# Altium PCB GRHV_Double_25v_KC.PcbDoc
Units mil, origin at the board's own origin, x right, y up, seen from the top; angles counter-clockwise.
Board outline 3000 x 4625 mil, 2 copper layers (Top Layer, Bottom Layer); 83 components, 41 nets, 200 pads, 4 vias.
Unrouted connection lines stored in the file: 26.
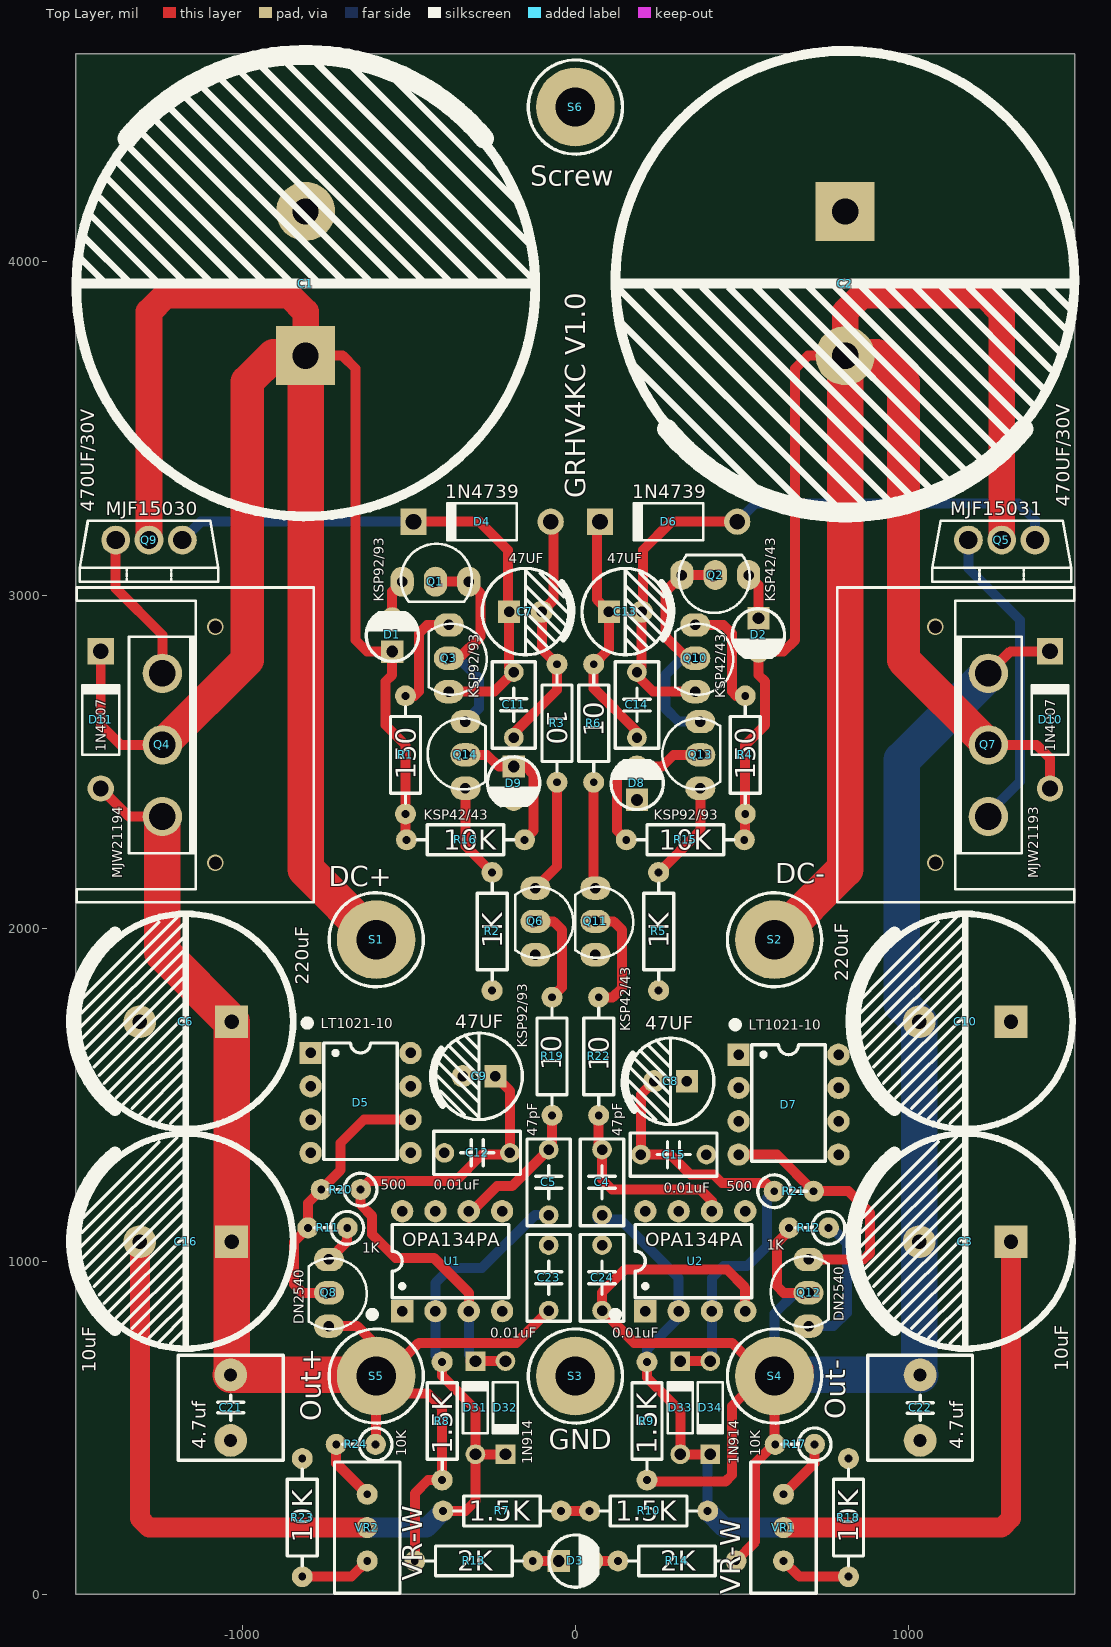
[diagram p0: Top Layer view]
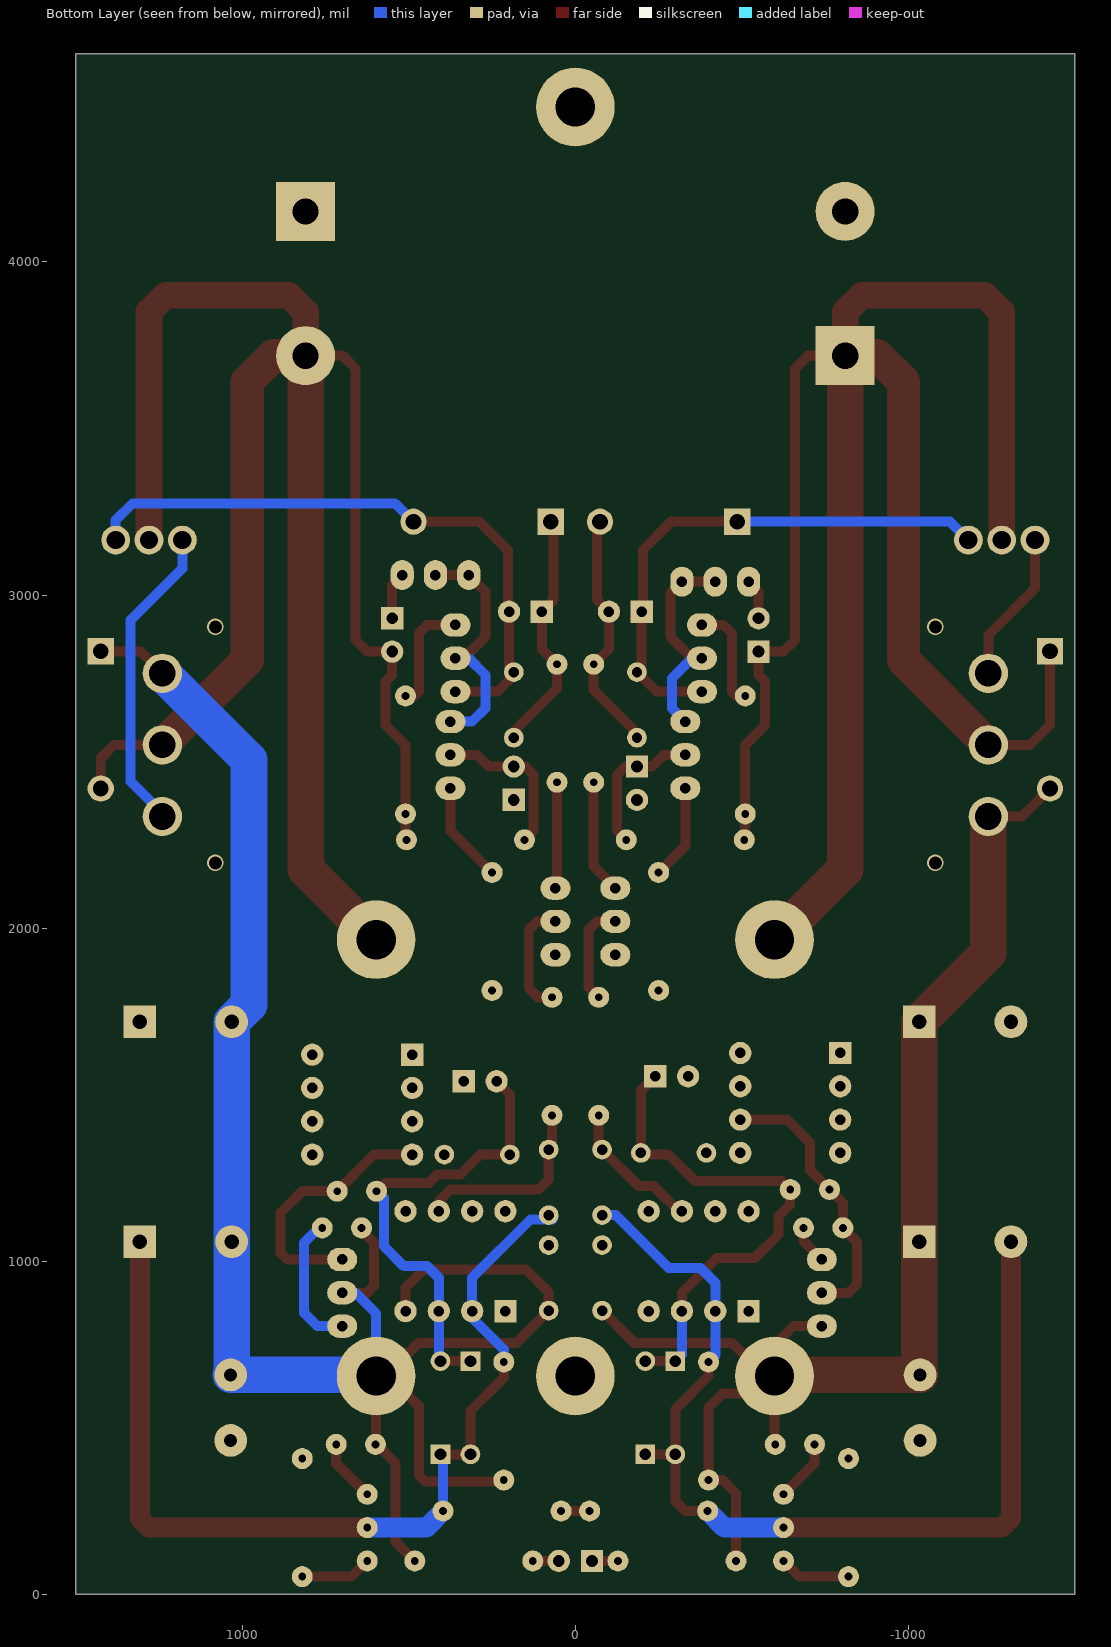
[diagram p1: Bottom Layer view, seen from below]

## Layer stack, top to bottom
Top Solder: solder mask 0.4, Solder Resist, Dk 3.5
Top Layer: signal copper 1.4
Dielectric 1: dielectric 12.6, FR-4, Dk 4.8
Bottom Layer: signal copper 1.4
Bottom Solder: solder mask 0.4, Solder Resist, Dk 3.5

## Board outline
-1500,0 1500,0 1500,4625 -1500,4625

## Design rules (kind name [scope] priority, off if disabled: settings)
Clearance [All] p1: gap=10 ignorepadtopadclearanceinfootprint=FALSE except(0: Arc-Hole Track-Hole SMDPad-Hole THPad-Hole Via-Hole Fill-Hole Poly-Hole Region-Hole Text-Hole)
PlaneClearance [All] p1: clearance=30
PlaneConnect [All] p1: planeconnectstyle=Relief reliefexpansion=20 reliefentries=4 reliefconductorwidth=20 reliefairgap=30
PolygonConnect [All] p1: thpad.connectstyle=Relief thpad.reliefconductorwidth=20 thpad.reliefentries=4 thpad.polygonreliefangle="45 Angle" thpad.airgapwidth=20 smdpad.connectstyle=Relief smdpad.reliefconductorwidth=20 smdpad.reliefentries=4 smdpad.polygonreliefangle="90 Angle" smdpad.airgapwidth=20 via.connectstyle=Relief via.reliefconductorwidth=20 via.reliefentries=4 via.polygonreliefangle="45 Angle" via.airgapwidth=20
RoomDefinition GRHV_Double_25v_KC [InComponentClass('GRHV_Double_25v_KC')] p1: confinementstyle=ConfineIn formatcopy=TRUE lockcomponents=FALSE outline 3180,-460 23330,-460 23330,590 3180,590
RoutingVias [All] p1: holewidth=28 width=50 viastyle="Through Hole" minholewidth=28 minwidth=50 maxholewidth=28 maxwidth=50
SolderMaskExpansion [All] p1: expansion=4
Width [All] p1: maxlimit=220 minlimit=10 preferedwidth=60
28 further rules are at their usual default settings.

## Components (designator, comment, footprint, x,y, rotation, side; value= is the part's Value field where it differs from the comment)
C1 "470UF/30V" "CAP 11*35*60" -810,3935 r90 top
C2 "470UF/30V" "CAP 11*35*60" 810,3935 r270 top
C3 "10uF" "CAP 7.0*16.5*20" 1170,1060 r180 top
C4 "47pF" "CBB 6.3*6.3*5" 80,1236.57 r270 top
C5 "47pF" "CBB 6.3*6.3*5" -80,1236.57 r270 top
C6 "220uF" "CAP 7.0*16.5*20" -1170,1720 r180 top
C7 "47UF" "CAP 2.5*6.3*11.2" -150,2950 r0 top
C8 "47UF" "CAP 2.5*6.3*11.2" 285.79,1540 r180 top
C9 "47UF" "CAP 2.5*6.3*11.2" -289.21,1555 r180 top
C10 "220uF" "CAP 7.0*16.5*20" 1170,1720 r180 top
C11 "0.1uF/275V" "CBB 6.3*6.3*5" -185,2670 r270 top
C12 "0.01uF" "CBB 6.3*6.3*5" -295,1325 r180 top
C13 "47UF" "CAP 2.5*6.3*11.2" 150,2950 r0 top
C14 "0.1uF/275V" "CBB 6.3*6.3*5" 185,2670 r90 top
C15 "0.01uF" "CBB 6.3*6.3*5" 295,1320 r0 top
C16 "10uF" "CAP 7.0*16.5*20" -1170,1060 r180 top
C21 "4.7uf" "CBB 7.2*7.2*13" -1035,560 r270 top
C22 "4.7uf" "CBB 7.2*7.2*13" 1035,560 r90 top
C23 "0.01uF" "CBB 6.3*6.3*5" -80,950 r270 top
C24 "0.01uF" "CBB 6.3*6.3*5" 80,950 r270 top
D1 "ValueValueAux" "LED 3MM-R" -550,2880 r90 top
D2 "ValueValueAux" "LED 3MM-R" 550,2880 r270 top
D3 "ValueValueAux" "LED 3MM-R" 0,100 r0 top
D4 "1N4739" DO-41 -280,3220 r180 top
D5 "LT1021-10" DIP8-300_MH -645,1475 r0 top
D6 "1N4739" DO-41 280,3220 r180 top
D7 "LT1021-10" DIP8-300_MH 640,1470 r0 top
D8 "ValueValueAux" "LED 3MM-R" 185,2435 r90 top
D9 "ValueValueAux" "LED 3MM-R" -185,2435 r270 top
D10 "1N4007" DO-41 1425,2625 r90 top
D11 "1N4007" DO-41 -1425,2625 r90 top
D31 "1N914" DO-35 -300,560 r90 top
D32 "1N914" DO-35 -210,560 r270 top
D33 "1N914" DO-35 315,560 r90 top
D34 "1N914" DO-35 405,560 r270 top
Q1 "KSP92/93" TO92A -520,3040 r90 top
Q2 "KSP42/43" TO92A 520,3060 r270 top
Q3 "KSP92/93" TO92A -380,2910 r0 top
Q4 "MJW21194" TO247V-HeatSink -1240,2550 r270 top
Q5 "MJF15031" TO220V 1380,3165 r180 top
Q6 "KSP92/93" TO92A -120,2120 r0 top
Q7 "MJW21193" TO247V-HeatSink 1240,2550 r90 top
Q8 "DN2540" TO92A -740,1005 r0 top
Q9 "MJF15030" TO220V -1180,3165 r180 top
Q10 "KSP42/43" TO92A 360,2910 r0 top
Q11 "KSP42/43" TO92A 60,2120 r0 top
Q12 "DN2540" TO92A 700,805 r180 top
Q13 "KSP92/93" TO92A 375,2420 r180 top
Q14 "KSP42/43" TO92A -330,2420 r180 top
R1 "150" "RS 1/4W" -510,2520 r90 top
R2 "1K" "RS 1/4W" -250,1990 r270 top
R3 "10" "RS 1/4W" -55,2615 r270 top
R4 "150" "RS 1/4W" 510,2520 r270 top
R5 "1K" "RS 1/4W" 250,1990 r90 top
R6 "10" "RS 1/4W" 55,2615 r90 top
R7 "1.5K" "RS 1/4W" -220,250 r0 top
R8 "1.5K" "RS 1/4W" -400,520 r90 top
R9 "1.5K" "RS 1/4W" 215,520 r270 top
R10 "1.5K" "RS 1/4W" 220,250 r0 top
R11 "1K" "RS 1/4W-V3" -685,1100 r180 top
R12 "1K" "RS 1/4W-V3" 760,1100 r180 top
R13 "2K" "RS 1/4W" -305,100 r180 top
R14 "2K" "RS 1/4W" 305,100 r0 top
R15 "10K" "RS 1/4W" 330,2265 r0 top
R16 "10K" "RS 1/4W" -330,2265 r0 top
R17 "10K" "RS 1/4W-V3" 718.11,450 r180 top
R18 "10K" "RS 1/4W" 820,230 r270 top
R19 "10" "RS 1/4W" -70,1615 r270 top
R20 "500" "RS 1/4W-V3" -645,1215 r180 top
R21 "500" "RS 1/4W-V3" 596.89,1210 r0 top
R22 "10" "RS 1/4W" 70,1615 r270 top
R23 "10K" "RS 1/4W" -820,230 r90 top
R24 "10K" "RS 1/4W-V3" -600,450 r180 top
S1 "DC+" Screw-M3 -598,1965 r0 top
S2 "DC-" Screw-M3 598,1965 r0 top
S3 "GND" Screw-M3 0,655 r0 top
S4 "Out-" Screw-M3 598,655 r0 top
S5 "Out+" Screw-M3 -598,655 r0 top
S6 "Screw" Screw-M3 0,4465 r0 top
U1 "OPA134PA" DIP8-300_MH -370,1000 r90 top
U2 "OPA134PA" DIP8-300_MH 360,1000 r90 top
VR1 "VR-W" "RS 1/2W-VR" 625,200 r90 top value=100K
VR2 "VR-W" "RS 1/2W-VR" -625,200 r270 top value=100K

## Footprints (in the part's own frame and the unit in brackets; to place one, negate y for a bottom-side part, rotate by r counter-clockwise, add the part's x,y. Pads: shape width x height; smd on the part's side, far side on the other; paste and mask are expansions set on the pad)
"CAP 2.5*6.3*11.2" [mm] "脚距2.5mm直径6.3mm高度11.2mm"
  rect 1.7x1.7 hole 0.8: 1(-1.25,0)
  round 1.7 hole 0.8: 2(1.25,0)
  silkscreen extent -3.3,-3.3 3.56,3.3, body extent -3.15,-3.15 3.16,3.15, height 11.23
"CAP 7.0*16.5*20" [mm] "脚距7.0mm直径16.5mm高度20mm"
  rect 2.5x2.5 hole 1.1: 1(-3.5,0.038)
  round 2.5 hole 1.1: 2(3.5,0.038)
  silkscreen extent -8.2,-8.2 8.61,8.2, body extent -8.26,-8.13 8.38,8.26, height 25.03
"CAP 11*35*60" [mm] "脚距11mm直径35mm高度60mm"
  rect 4.5x4.5 hole 2: 1(-5.5,0)
  round 4.5 hole 2: 2(5.5,0)
  silkscreen extent -17.75,-17.51 17.44,17.48, body extent -17.91,-17.65 17.53,17.65, height 40.03
"CBB 6.3*6.3*5" [mm] "脚距5mm高6.3mm厚3mm"
  round 1.5 hole 0.8: 1(-2.5,0) 2(2.5,0)
  silkscreen extent -3.3,-1.65 3.3,1.65, body extent -3.15,-1.5 3.15,1.5, height 6.8
"CBB 7.2*7.2*13" [mm] "脚距5mm高13mm厚7.2mm"
  round 2.5 hole 1: 1(-2.5,0) 2(2.5,0)
  silkscreen extent -4,-4 4,4, body extent -4,-4 4,4, height 17.53
DIP8-300_MH [mm] "带底座 9.4*7.6*3.8(长宽高）"
  rect 1.7x1.7 hole 0.8: 1(-3.81,3.81)
  round 1.7 hole 0.8: 2(-3.81,1.27) 3(-3.81,-1.27) 4(-3.81,-3.81) 5(3.81,-3.81) 6(3.81,-1.27) 7(3.81,1.27) 8(3.81,3.81)
  silkscreen extent -4.32,-4.32 2.79,6.35, body extent -5,-5.19 5,5.19, height 7.7
DO-35 [mm] "Diode, Axial; Body 3.8 x 1.9 mm (LxDia. max), Lead Dia. 0.53 mm (max)"
  round 1.5 hole 0.9: 1(-3.55,0)
  rect 1.5x1.5 hole 0.9: 2(3.55,0)
  silkscreen extent -1.95,-0.95 2.05,0.95
DO-41 [mm] "Diode, Axial; Body 5.2 x 2.7 mm (LxDia. max), Lead Dia. 0.86 mm (max)"
  round 2 hole 1.2: 1(-5.23,0)
  rect 2x2 hole 1.2: 2(5.23,0)
  silkscreen extent -2.65,-1.4 2.75,1.4
"LED 3MM-R" [mm] "红色3mm直插LED"
  rect 1.7x1.7 hole 0.9: 1(-1.27,0)
  round 1.7 hole 0.9: 2(1.27,0)
  silkscreen extent -2.01,-2 1.72,1.98, body extent -1.95,-1.95 1.64,1.95, height 5.55
"RS 1/2W-VR" [mm] "直插3脚顶调可调电阻，脚距2.54mm，长10mm*宽5mm*高10mm"
  round 1.6 hole 0.6: 1(-2.54,0) 2(2.54,0) 3(0,0)
  silkscreen extent -5,-2.5 5,2.5
"RS 1/4W" [mm] "直插色环电阻，脚距9mm，直径2.3mm"
  round 1.6 hole 0.6: 1(-4.5,0) 2(4.5,0)
  silkscreen extent -3.68,-1.14 3.68,1.14, body extent -4.72,-1.16 4.73,1.16, height 2.32
"RS 1/4W-V3" [mm] "直插色环电阻，脚距3mm，直径2.3mm"
  round 1.6 hole 0.6: 1(0,0) 2(3,0)
  silkscreen extent -1.25,-1.25 2.5,1.25, body extent -1.16,-1.16 3.23,1.16, height 7.42
Screw-M3 [mm]
  round 6 hole 3: 1(0,0)
  silkscreen extent -3.59,-3.59 3.59,3.59
TO92A [mil]
  oval 90x70 hole 31.5: 1(0,0) 2(0,-100) 3(0,-200)
  silkscreen extent -60,-209 114,4
TO220V [mm]
  round 2.2 hole 1.397: 1(0,0) 2(2.54,0) 3(5.08,0)
  silkscreen extent -2.75,-1.48 7.83,3.18
TO247V-HeatSink [mm]
  round 3 hole 2.032: 1(-5.461,0) 2(0,0) 3(5.461,0)
  silkscreen extent -12,-6.54 12,11.54

## Part data
C1 C2 C3 C6 C7 C8 C9 C10 C13 C16: library part C-CAP, "直插电解电容", BOM名称=直插电解电容, 学习资源=www.ooocke.com, 版权归属=源创客
C4 C5 C11 C12 C14 C15 C23 C24: library part C-CBB, "CBB电容", BOM名称=CBB电容, 学习资源=www.ooocke.com, 版权归属=源创客
C21 C22: library part C-MKS, "MKS薄膜电容"
D1 D2 D3 D8 D9: library part LED, "直插式LED"
D4 D6: "9.1V/1W稳压管"
D5 D7: library part LT1021-10-2P, "10V Precision Reference 2 Pin Config"
D10 D11: "整流二极管", BOM名称=整流二极管, 学习资源=www.ooocke.com, 版权归属=源创客
D31 D32 D33 D34: "高速开关管 1V/0.25W"
Q1 Q3 Q6 Q13: "High Voltage PNP Transistor"
Q2 Q10 Q11 Q14: "High Voltage NPN Transistor"
Q4 Q9: "Power NPN Transistor"
Q5 Q7: "Power PNP Transistor"
Q8 Q12: "N沟道耗尽型DMOS场效应管 400V/150ma"
R1 R2 R3 R4 R5 R6 R7 R8 R9 R10 R11 R12 R13 R14 R15 R16 R17 R18 R19 R20 R21 R22 R23 R24: library part R-CRR, "直插色环电阻", BOM名称=色环电阻, 学习资源=www.ooocke.com, 版权归属=源创客
S1 S2 S3 S4 S5 S6: library part ScrewConnector, "Screw Connector"
VR1 VR2: "直插可调电阻-顶调"

## Via types
v1: diameter 50, hole 39.37, Top Layer to Bottom Layer, 4 vias

## Nets (pads, with @x,y where several pads share a name; then routed paths per layer and width w, separated by ;. In a path a pad name is that pad's centre, name@x,y a point inside that pad or via, vN(x,y) a via of type N, cw(c..) or ccw(c..) an arc to the next point about the centre after c; other vN are vias at no path point)
GND: C1.2 C2.1 C6.2 C8.1 C9.2 C10.1 C12.2 C15.2 C21.2 C22.1 C23.1 C24.1 D5.4 D7.6 D8.1 D9.2 Q6.3 Q11.3 R2.2 R5.1 R7.2 R10.1 R18.1 R23.2 S3.1 U1.4 U2.7 | length 85.7
  Top Layer w30: R7.2 R10.1
NetC1_1: C1.1 D1.1 D11.2 Q4.2 Q9.2 R1.1 R16.1 S1.1 | length 6707.9
  Top Layer w30: D11.2 -1425,2610 -1365,2550 Q4.2 ; C1.1 -698.46,3718.46 -660,3680 -660,2865 -625,2830 D1.1 -550,2760 -570,2740 -570,2610 -510,2550 R1.1 -510,2267.83 R16.1
  Top Layer w80: Q9.2 -1280,3850 -1230,3900 -860,3900 -810,3850 C1.1
  Top Layer w100: Q4.2 -985,2805 -985,3640 -906.54,3718.46 C1.1
  Top Layer w110: C1.1 -810,2177 S1.1
NetC2_2: C2.2 D2.2 D10.1 Q5.2 Q7.2 R4.2 R15.2 S2.1 | length 6569.6
  Top Layer w30: R15.2 510,2267.83 R4.2 510,2550 570,2610 570,2740 550,2760 D2.2 625,2830 660,2865 660,3680 698.46,3718.46 C2.2 ; Q7.2 1385,2550 1425,2510 D10.1
  Top Layer w80: C2.2 810,3850 860,3900 1230,3900 1280,3850 Q5.2
  Top Layer w100: C2.2 906.54,3718.46 985,3640 985,2805 Q7.2
  Top Layer w110: S2.1 810,2177 C2.2
NetC3_1: C3.1 C4.2 D33.1 D34.2 R9.1 R10.2 U2.2 VR1.3 | length 2983
  Top Layer w30: R9.1@215,692.17 215,650 315,550 D33.1 400,420.24 D34.2@405,415.24
  Top Layer w60: VR1.3 1280,200 1307.8,227.8 C3.1
  Bottom Layer w30: C4.2@65,1131.57 75,1131.57 68.43,1125 135,1125 310,950 U2.2 310,830 215,735 R9.1 R9.1@215,692.17 ; R10.2 397.17,412.4 D34.2
  Bottom Layer w60: R10.2 447.17,200 VR1.3
NetC3_2: C3.2 C10.2 C22.2 C24.2 D10.2 Q7.3 Q12.2 R9.2 R12.2 R14.2 R17.2 S4.1 U2.4 | length 6246.4
  Top Layer w30: R9.2@215,337.83 450,337.83 470,357.83 470,565 560,655 S4.1@570,655 ; R14.2 540,157.83 540,394 R17.2@598,452 ; S4.1@510,675 S4.1@550,675 ; U2.4 510,920 455,975 148.43,975 80,906.57 C24.2 176.57,755 470,755 S4.1@550,675 ; R17.2@598,443.67 R17.2@598,452 ; S4.1@598,603 R17.2@598,452 ; S4.1@598,722 S4.1 ; R17.2 R17.2@598,452 ; R12.2 641.89,1091.89 605,1055 605,925 625,905 Q12.2 ; S4.1@665,710 S4.1@665,675 ; S4.1@700,645 690,655 S4.1@680,655 ; S4.1@700,665 S4.1@700,680 ; Q7.3 1305.91,2830.91 D10.2 ; S4.1@550,675 578,675 S4.1 ; S4.1@550,675 S4.1@570,655 ; S4.1@570,655 S4.1 ; S4.1 S4.1@645,655 ; S4.1@645,655 S4.1@665,675 ; S4.1@645,655 S4.1@680,655 ; S4.1@665,675 665,670 S4.1@680,655
  Bottom Layer w30: S4.1 598,843 660,905 Q12.2
  Bottom Layer w110: S4.1 601.43,658.43 C22.2 1032.2,661.22 C3.2 C10.2 980,1770.7 980,2505 Q7.3
NetC4_1: C4.1 R22.2 U2.6 | length 597.1
  Top Layer w30: R22.2 70,1333.43 75,1328.43 C4.1@75,1330 ; C4.1 80,1245 110,1215 375,1215 410,1180 U2.6 U2.6@415,1145
NetC5_1: C5.1 R19.2 U1.6 | length 455.5
  Top Layer w30: U1.6@-328.43,1141.57 U1.6@-320,1141.57 ; U1.6@-326.57,1136.57 U1.6@-320,1130 ; U1.6 U1.6@-320,1141.57 ; R19.2 -70,1345 C5.1 -190,1225 -235,1225 -320,1140 U1.6@-320,1141.57
NetC5_2: C5.2 C16.2 D31.1 D32.2 R7.1 R8.2 U1.2 VR2.3 | length 3107
  Top Layer w30: U1.2@-420,840 U1.2 ; R8.2 -400,655 -300,555 D31.1 ; R7.1 -330,250 -300,280 D31.1 ; D32.2@-215,420.24 D31.1
  Top Layer w60: C16.2 -1307.8,227.8 -1280,200 VR2.3
  Bottom Layer w30: R8.2 -420,717.17 U1.2 -420,935 -375,980 -280,980 -121.85,1138.15 C5.2
  Bottom Layer w60: VR2.3 -447.17,200 R7.1
NetC6_1: C6.1 C16.1 C21.1 C23.2 D11.1 Q4.3 Q8.3 R8.1 R13.2 R24.1 S5.1 U1.7 | length 4193.2
  Top Layer w30: D11.1 -1340.91,2335 Q4.3 ; Q8.3 -655,805 -598,748 S5.1 S5.1@-598,603 ; R24.1@-601.89,450 -598,453.89 S5.1@-598,603 ; S5.1@-570,655 -470,755 -176.57,755 C23.2 ; R13.2 -482.17,302.83 -442.17,342.83 R8.1 -400,560 -443,603 S5.1@-598,603
  Top Layer w110: Q4.3 -1240,1926.3 C6.1 C16.1 -1032.2,661.22 C21.1 -601.43,658.43 S5.1
NetC7_1: C7.1 C11.1 D4.2 Q3.3 Q9.1 | length 1642.9
  Top Layer w30: D4.2 -287.8,3220 -202.8,3135 -202.8,2953.58 C7.1 -199.21,2782.64 C11.1 -243.43,2710 Q3.3 ; Q3.3@-400,2695 Q3.3@-389.72,2705.28
  Bottom Layer w30: Q9.1 -1125,3220 D4.2
NetC7_2: C7.2 C11.2 D4.1 R3.1 | length 739.8
  Top Layer w30: C11.2 -185,2585 -55,2715 R3.1 -100.79,2837.95 C7.2 -65,2985.79 -65,3210.91 D4.1
NetC8_2: C8.2 C15.1 D33.2 D34.1 R21.1 U2.3 | length 1389.1
  Top Layer w30: C8.2 196.57,1500 C15.1 285,1320 345,1260 415,1260 440,1235 571.89,1235 R21.1 ; D33.2 D34.1 ; U2.3@410,840 U2.3
  Bottom Layer w30: D34.1@405,694.76 410,699.76 U2.3 410,950 445,985 515,985 575,1045 R21.1@575,1190
NetC9_1: C9.1 C12.1 D31.2 D32.1 R20.1 U1.3 | length 1587
  Top Layer w30: U1.3 -320,905 -425,1010 -540,1010 -610,1080 -610,1135 -645,1170 R20.1 -620,1240 -360,1240 -280,1320 C12.1@-196.57,1320 ; D31.2@-315,699.76 D31.2 D32.1@-215,699.76 ; C9.1 -196.57,1511.57 C12.1 C12.1@-196.57,1320 ; C12.1@-180,1320 C12.1@-196.57,1320
  Bottom Layer w30: U1.3 -320,719.76 D31.2
NetC13_1: C13.1 C14.1 D6.2 R6.2 | length 739.8
  Top Layer w30: D6.2 65,3210.91 65,2985.79 C13.1 100.79,2837.95 R6.2 55,2720 185,2590 C14.1
NetC13_2: C13.2 C14.2 D6.1 Q5.1 Q10.3 | length 1899.7
  Top Layer w30: Q10.3 233.43,2710 179.21,2764.21 199.21,2784.21 C13.2 202.8,2953.58 202.8,3135 287.8,3220 D6.1
  Bottom Layer w30: D6.1 540.91,3275 1330,3275 1380,3225 Q5.1
NetD1_2: D1.2 Q1.1 | length 122.4
  Top Layer w30: D1.2 -550,3010 Q1.1
NetD2_1: D2.1 Q2.1 | length 142.4
  Top Layer w30: Q2.1 550,3030 D2.1
NetD3_1: D3.1 R13.1 | length 77.8
  Top Layer w30: R13.1 D3.1
NetD3_2: D3.2 R14.1 | length 77.8
  Top Layer w30: D3.2 R14.1
NetD5_6: D5.6 Q8.2 R11.2 R20.2 | length 837.3
  Top Layer w30: Q8.2 -820,905 -845,930 -845,1058.11 R11.2 -803.11,1175 R20.2 -705,1273.11 -705,1355 -635,1425 D5.6
NetD7_4: D7.4 Q12.3 R21.2 | length 780.8
  Top Layer w30: D7.4 605,1320 R21.2 820,1210 885,1145 885,1025 865,1005 Q12.3
NetD8_2: D8.2 Q13.2 R15.1 | length 481.4
  Top Layer w30: R15.1 125,2292.83 125,2460 150,2485 D8.2 260,2485 295,2520 Q13.2
NetD9_1: D9.1 Q14.2 R16.2 | length 436.4
  Top Layer w30: Q14.2 -265,2520 -230,2485 D9.1 -150,2485 -125,2460 -125,2292.83 R16.2
NetQ1_2: Q1.2 Q1.3 Q3.2 Q14.3 | length 662.8
  Top Layer w30: Q1.2 Q1.3 -285,3005 -285,2875 -350,2810 Q3.2
  Bottom Layer w30: Q3.2 -350,2810 -290,2750 -290,2660 Q14.3
NetQ2_2: Q2.2 Q2.3 Q10.2 Q13.3 | length 754.9
  Top Layer w30: Q10.2 335,2810 270,2875 270,3010 Q2.3 Q2.2
  Bottom Layer w30: Q10.2 320,2810 270,2760 270,2660 310,2620 Q13.3
NetQ3_1: Q3.1 R1.2 | length 320.7
  Top Layer w30: R1.2 -482.83,2697.17 -470,2710 -470,2885 -445,2910 Q3.1
NetQ4_1: Q4.1 Q9.3 | length 458
  Top Layer w30: Q9.3 -1380,3020 -1240,2880 Q4.1
NetQ5_3: Q5.3 Q7.1 | length 937.7
  Bottom Layer w30: Q5.3 1180,3080 1335,2925 1335,2440 Q7.1@1230,2335
NetQ6_1: Q6.1 R3.2 | length 344.8
  Top Layer w30: Q6.1 -55,2185 R3.2
NetQ6_2: Q6.2 R19.1 | length 305.6
  Top Layer w30: Q6.2 -65,2020 -40,1995 -40,1822.17 R19.1
NetQ8_1: Q8.1 R11.1 | length 117.8
  Top Layer w30: Q8.1 -685,1060 R11.1
NetQ10_1: Q10.1 R4.1 | length 340.7
  Top Layer w30: Q10.1 445,2910 470,2885 470,2710 482.83,2697.17 R4.1
NetQ11_1: Q11.1 R6.1 | length 319.9
  Top Layer w30: R6.1 55,2125 Q11.1
NetQ11_2: Q11.2 R22.1 | length 346.9
  Top Layer w30: Q11.2 115,2020 140,1995 140,1820 112.17,1792.17 R22.1
NetQ12_1: Q12.1 R12.1 | length 415.2
  Bottom Layer w30: Q12.1 775,805 815,845 815,1055 770,1100 R12.1
NetQ13_1: Q13.1 R5.2 | length 304.6
  Top Layer w30: R5.2 375,2292.17 Q13.1
NetQ14_1: Q14.1 R2.1 | length 290.4
  Top Layer w30: Q14.1@-333.11,2416.89 Q14.1 -330,2247.17 R2.1
NetR17_1: R17.1 VR1.2 | length 188.6
  Top Layer w30: VR1.2 718.11,393.11 R17.1
NetR18_2: R18.2 VR1.1 | length 214.5
  Top Layer w30: VR1.1 672.17,52.83 R18.2
NetR23_1: R23.1 VR2.2 | length 214.5
  Top Layer w30: R23.1 -672.17,52.83 VR2.2
NetR24_2: R24.2 VR2.1 | length 188.6
  Top Layer w30: R24.2 -718.11,393.11 VR2.1
pads on no net: D5.1 D5.2 D5.3 D5.5 D5.7 D5.8 D7.1 D7.2 D7.3 D7.5 D7.7 D7.8 S6.1 U1.1 U1.5 U1.8 U2.1 U2.5 U2.8
copper on no net:
  other v1: -1080.94,2195.67 1080.94,2195.67 -1080.94,2904.33 1080.94,2904.33

## Silkscreen, mask and mechanical layers (free items; w line width, h text height)
Top Overlay:
  text "GRHV4KC V1.0" at 30,3290 h60 r90
Mechanical 1:
  the board outline again, w10
Drill Drawing:
  the board outline again, w10